# Altium PCB T1_MODIFYV1_0527.PCBDOC (part 5 of 6)
Units mm, origin at the board's own origin, x right, y up, seen from the top; angles counter-clockwise.
Board outline 1320.8 x 844.04 mm, 2 copper layers (Top Layer, Bottom Layer); 219 components, 215 nets, 1393 pads, 492 vias.
Unrouted connection lines stored in the file: 60.
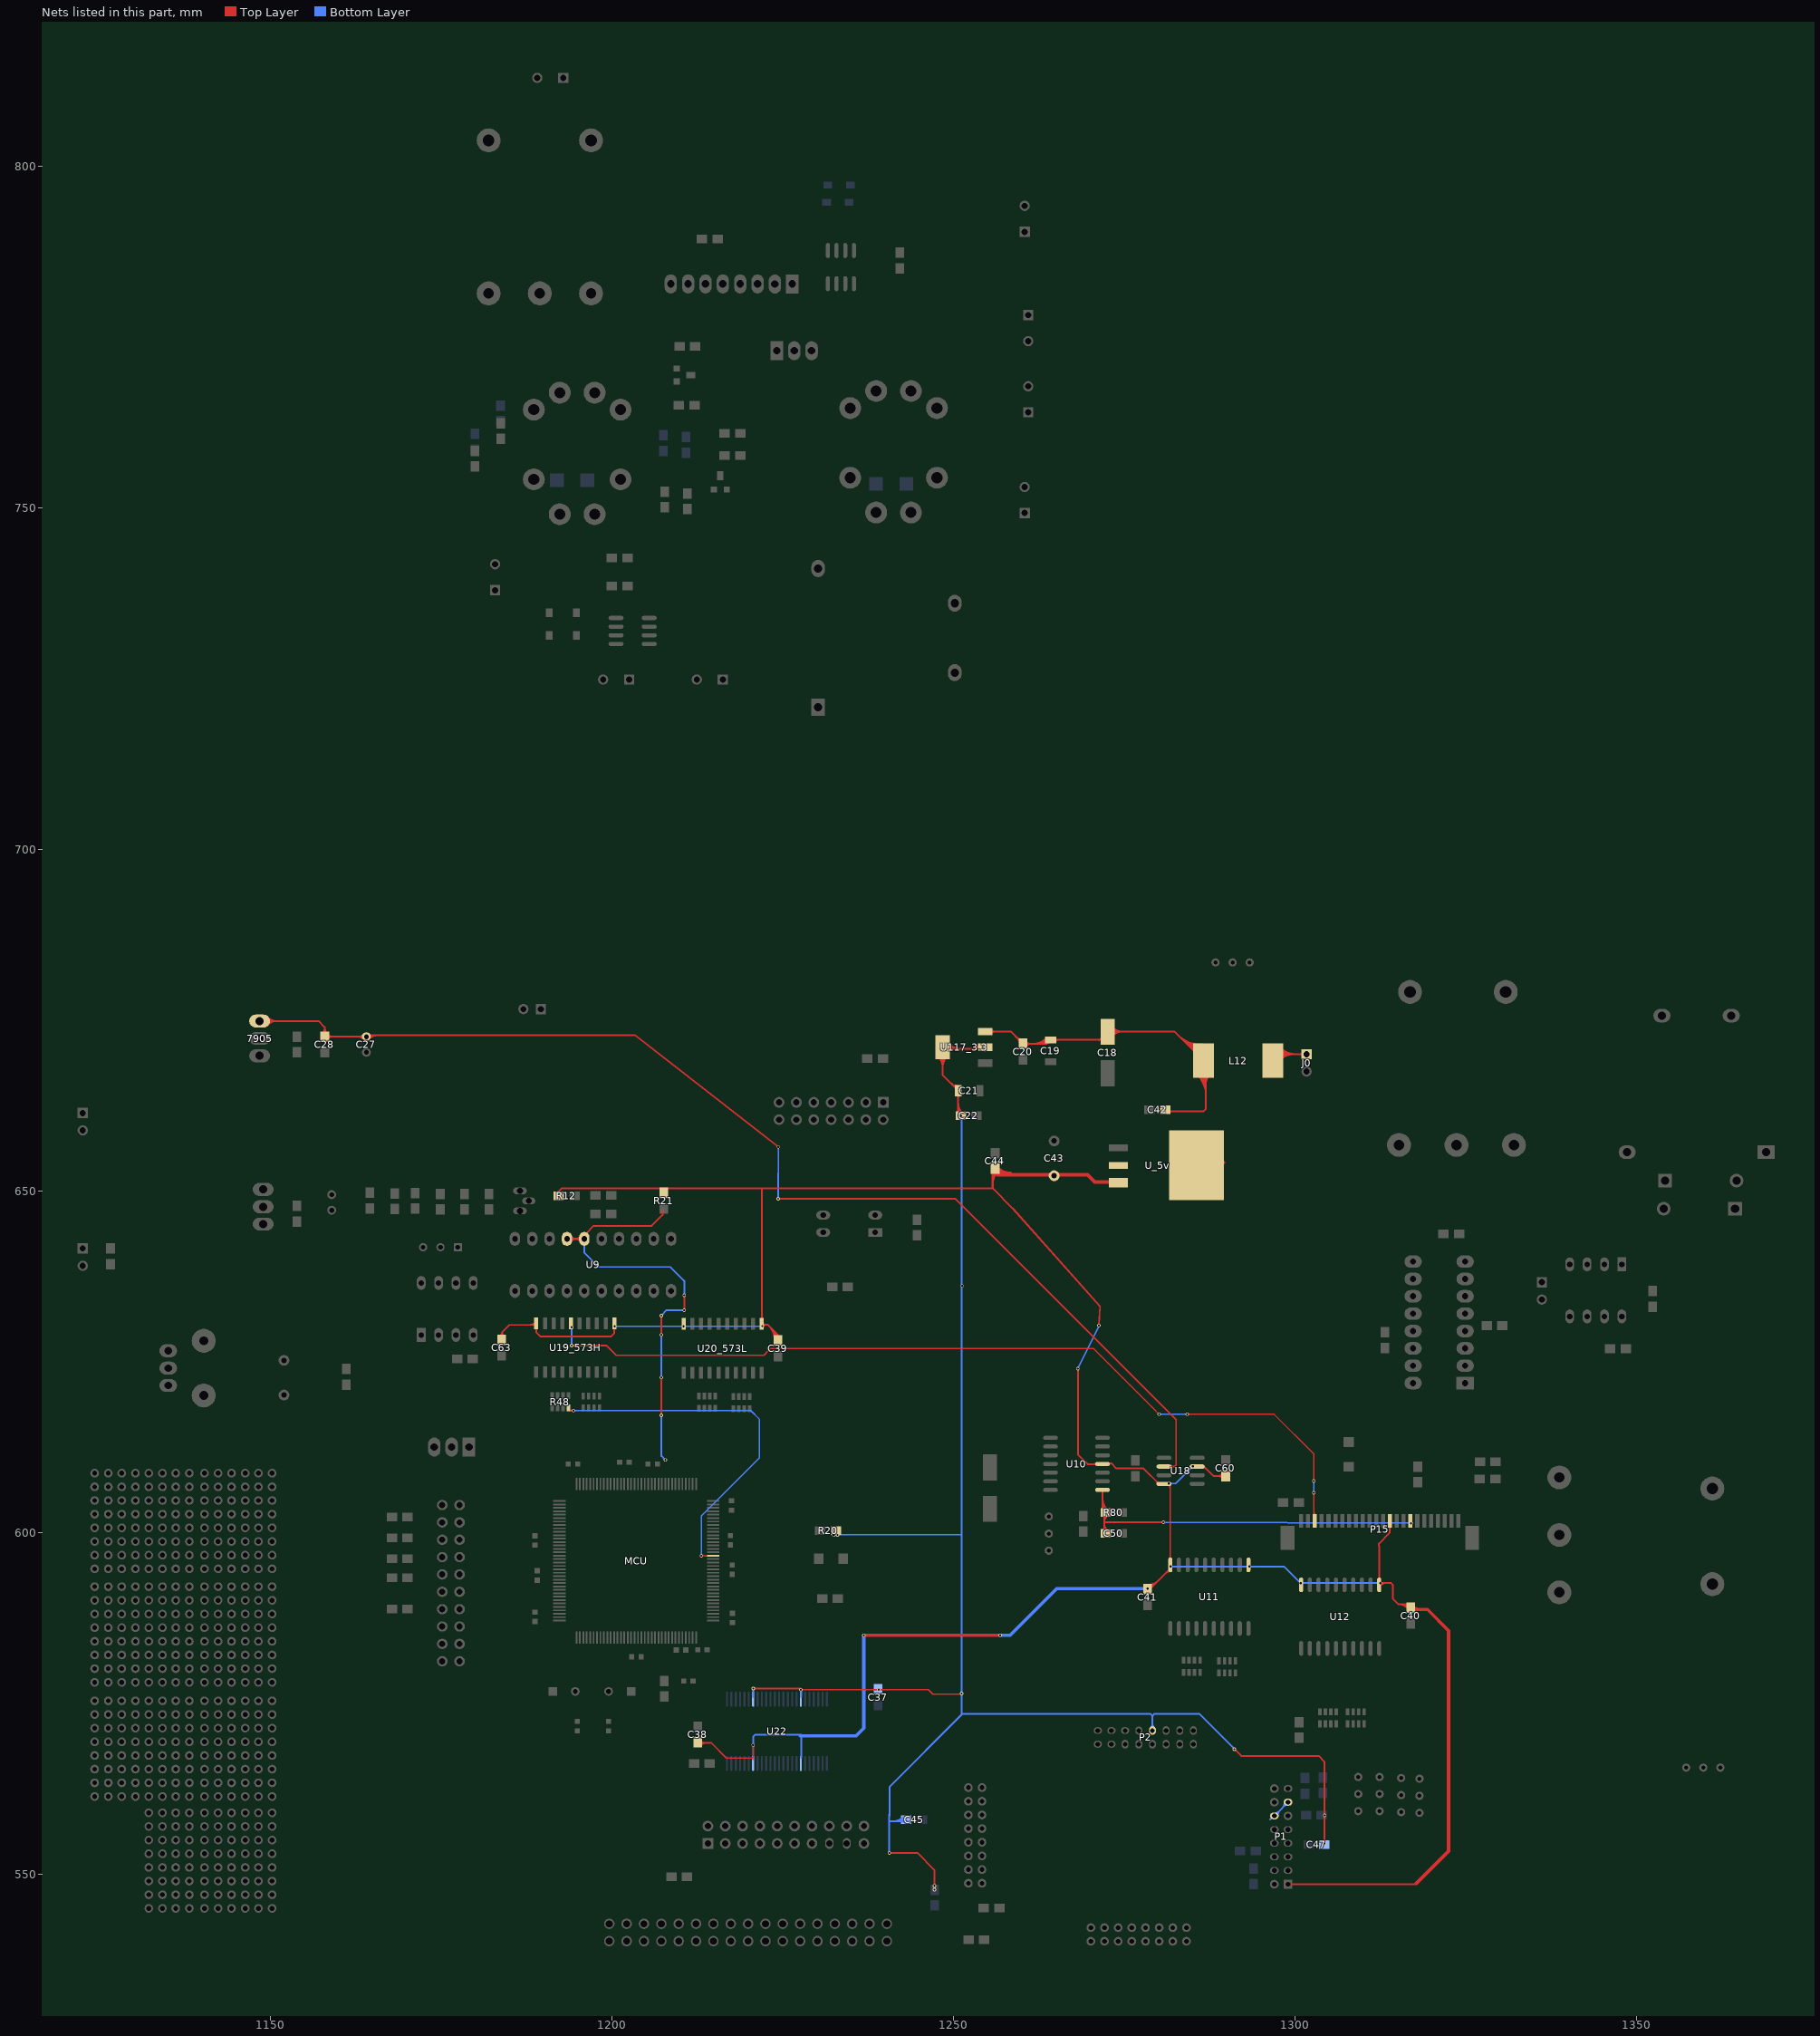
[diagram p5: the nets of this part, all layers, seen from the top]

## Via types
v1: diameter 0.5, hole 0.3, Top Layer to Bottom Layer, 470 vias
v2: diameter 0.8, hole 0.5, Top Layer to Bottom Layer, 12 vias
v3: diameter 3, hole 1.5, Top Layer to Bottom Layer, 4 vias
v4: diameter 3, hole 3, Top Layer to Bottom Layer, 4 vias
v5: diameter 1, hole 0.7, Top Layer to Bottom Layer, 2 vias

## Nets (pads, with @x,y where several pads share a name; then routed paths per layer and width w, separated by ;. In a path a pad name is that pad's centre, name@x,y a point inside that pad or via, vN(x,y) a via of type N, cw(c..) or ccw(c..) an arc to the next point about the centre after c; other vN are vias at no path point) (continued)
VCC_IN: C18.1 C19.1 C20.1 C42.1 L12.1 U117_3.3.3 U_5v.3 | length 106.2
  Top Layer w0.254: U117_3.3.3@1254.583,673.393 1258.327,673.393 C20.1@1260.119,671.601 1263.599,671.601 C19.1@1264.183,672.185 1271.371,672.185 C18.1@1272.565,673.379 1282.324,673.379 L12.1@1286.566,669.138 ; U117_3.3.3@1255.408,673.094 cw(c1256.13,672.372) 1256.13,673.393 cw(c1256.13,674.415) U117_3.3.3@1255.408,673.693 ; 1259.035,672.685 ccw(c1260.119,673.769) C20.1@1260.119,672.236 ; 1259.342,672.379 cw(c1258.692,671.728) C20.1@1259.611,671.728 ; 1259.469,672.252 ccw(c1260.119,672.902) C20.1@1260.119,671.982 ; C20.1@1260.479,671.242 cw(c1261.346,670.375) 1261.346,671.601 cw(c1261.346,672.828) C20.1@1260.479,671.961 ; 1261.523,671.601 ccw(c1261.523,674.496) C19.1@1263.57,672.449 ; 1262.136,671.601 ccw(c1262.136,673.883) C19.1@1263.749,672.27 ; 1262.749,671.601 ccw(c1262.749,673.269) C19.1@1263.929,672.09 ; 1263.363,671.601 ccw(c1263.363,672.656) C19.1@1264.108,671.91 ; C19.1@1264.797,671.922 cw(c1265.434,671.285) 1265.434,672.185 cw(c1265.434,673.086) C19.1@1264.797,672.449 ; 1271.334,672.148 cw(c1271.857,671.625) C18.1@1272.321,672.201 ; 1271.534,672.348 cw(c1272.035,671.846) C18.1@1272.48,672.399 ; C18.1@1273.021,672.924 cw(c1274.12,671.825) 1274.12,673.379 cw(c1274.12,674.934) C18.1@1273.021,673.835 ; C18.1@1273.2,672.744 cw(c1274.733,671.211) 1274.733,673.379 cw(c1274.733,675.547) C18.1@1273.2,674.014 ; C42.1@1280.947,661.695 1286.535,661.695 1286.916,662.076 1286.916,669.701 L12.1@1286.032,670.585 ; 1282.837,672.867 ccw(c1286.095,676.125) L12.1@1286.458,671.531 ; 1283.226,672.477 ccw(c1286.152,675.403) L12.1@1286.478,671.278 ; 1283.616,672.088 ccw(c1286.209,674.681) L12.1@1286.498,671.025 ; 1284.005,671.698 ccw(c1286.266,673.959) L12.1@1286.518,670.772 ; 1284.395,671.309 ccw(c1286.323,673.237) L12.1@1286.538,670.519 ; 1284.784,670.919 ccw(c1286.38,672.515) L12.1@1286.558,670.265 ; 1284.947,670.757 cw(c1284.353,670.163) L12.1@1285.193,670.163 ; L12.1@1285.595,667.142 cw(c1282.405,663.951) 1286.916,663.951 ; L12.1@1285.775,667.321 cw(c1283.018,664.565) 1286.916,664.565 ; L12.1@1285.954,667.501 cw(c1283.631,665.178) 1286.916,665.178 ; L12.1@1286.134,667.681 cw(c1284.244,665.791) 1286.916,665.791 ; L12.1@1286.313,667.86 cw(c1284.857,666.404) 1286.916,666.404 ; 1286.916,665.644 cw(c1289.034,665.644) L12.1@1287.537,667.142 ; 1286.916,666.258 cw(c1288.421,666.258) L12.1@1287.357,667.321
VDD33: C21.1 C22.1 C37.2 C45.1 C47.2 P2.23 R20.2 U22.31 U22.42 U117_3.3.2 U117_3.3.4 | length 293.2
  Top Layer w0.254: v1(1220.648,577.24) v1@1227.531,577.215 ; v1(1227.607,577.063) 1246.302,577.063 1246.962,576.402 1250.747,576.402 v1(1251.153,576.504) ; v1(1240.561,553.161) 1244.676,553.161 1247.165,550.672 v1(1247.165,547.776) ; U117_3.3.4@1247.713,669.748 cw(c1246.095,668.13) 1248.383,668.13 cw(c1250.672,668.13) U117_3.3.4@1249.054,669.748 ; U117_3.3.4@1247.893,669.928 cw(c1246.708,668.743) 1248.383,668.743 cw(c1250.059,668.743) U117_3.3.4@1248.874,669.928 ; U117_3.3.4@1248.383,670.865 1254.252,670.865 1254.608,670.509 ; U117_3.3.4@1248.383,671.093 1248.383,667.005 C21.1@1250.645,664.743 1250.645,661.467 v1(1251.052,661.06) ; U117_3.3.4@1248.695,671.405 ccw(c1249.998,672.708) 1249.998,670.865 ; U117_3.3.4@1248.874,670.603 cw(c1249.507,669.97) 1249.507,670.865 ; U117_3.3.4@1248.874,671.584 ccw(c1250.611,673.321) 1250.611,670.865 ; U117_3.3.4@1249.054,670.423 cw(c1250.12,669.357) 1250.12,670.865 ; U117_3.3.4@1249.054,671.764 ccw(c1251.224,673.934) 1251.224,670.865 ; 1249.411,665.978 ccw(c1250.645,667.212) C21.1@1250.645,665.466 ; 1249.845,665.544 ccw(c1250.645,666.345) C21.1@1250.645,665.212 ; C21.1@1250.382,664.13 cw(c1249.745,663.493) 1250.645,663.493 cw(c1251.546,663.493) C21.1@1250.909,664.13 ; 1250.645,661.734 ccw(c1251.599,661.734) C22.1@1250.925,661.06 ; 1250.645,662.348 ccw(c1252.212,662.348) C22.1@1251.104,661.24 ; 1250.645,662.961 ccw(c1252.825,662.961) C22.1@1251.284,661.42 ; 1252.485,670.865 ccw(c1252.485,672.666) U117_3.3.2@1253.759,671.393 ; 1253.099,670.865 ccw(c1253.099,672.053) U117_3.3.2@1253.939,671.213 ; v1(1291.082,568.35) 1292.073,567.36 1303.426,567.36 1304.265,566.522 v1(1304.265,554.558)
  Bottom Layer w0.254: U22.31@1220.622,575.97 v1@1220.622,577.215 ; v1(1227.607,577.063) v1@1227.709,577.063 ; U22.42@1227.658,575.945 v1@1227.658,577.012 ; v1(1232.988,599.705) 1233.322,599.745 1250.975,599.745 ; v1(1240.561,553.161) 1240.561,558.775 ; 1240.587,558.597 1240.587,562.839 1251.217,573.468 ; 1240.612,557.784 1241.146,557.784 ; 1241.775,557.809 ccw(c1241.775,559.163) C45.1@1242.742,558.216 ; 1242.249,557.809 cw(c1242.249,557.363) C45.1@1242.564,557.679 ; C45.1@1242.561,558.393 cw(c1241.171,559.754) 1241.171,557.809 C45.1@1243.076,557.809 ; v1(1251.052,661.06) 1251.153,660.959 1251.153,573.468 ; v1@1251.053,661.062 cw(c1250.811,660.82) 1251.153,660.82 ; v1@1251.078,576.731 ccw(c1250.898,576.912) 1251.153,576.912 ; v1@1251.078,576.734 cw(c1250.898,576.553) v1@1251.153,576.553 ; 1251.153,573.532 1278.788,573.532 1279.082,573.238 ; P2.23@1278.819,571.477 ccw(c1278.182,572.114) 1279.082,572.114 ccw(c1279.983,572.114) P2.23@1279.346,571.477 ; P2.23@1279.082,571.078 1279.082,573.238 ; v1(1291.082,568.35) 1285.9,573.532 1279.376,573.532 1279.082,573.238
  other v1: 1247.165,548.335 1304.29,558.673 1239.012,577.063 1232.433,599.669 1251.255,636.143 1250.671,661.086
VDD_-5: 7905.3 C27.2 C28.2 U18.6 | length 185.5
  Top Layer w0.254: 7905.3@1148.258,674.929 1157.021,674.929 1157.91,674.04 C28.2@1157.91,672.643 C27.2@1164.006,672.643 ; 7905.3@1149.36,674.525 cw(c1150.336,673.549) 1150.336,674.929 cw(c1150.336,676.309) 7905.3@1149.36,675.333 ; 7905.3@1149.54,674.345 cw(c1150.949,672.936) 1150.949,674.929 cw(c1150.949,676.922) 7905.3@1149.54,675.513 ; C28.2@1157.551,673.129 ccw(c1156.683,673.996) 1157.91,673.996 ccw(c1159.136,673.996) C28.2@1158.269,673.129 ; C28.2@1158.269,672.284 cw(c1159.136,671.416) 1159.136,672.643 cw(c1159.136,673.869) C28.2@1158.269,673.002 ; C27.2@1163.636,672.273 ccw(c1162.743,671.38) 1162.743,672.643 ccw(c1162.743,673.905) C27.2@1163.636,673.013 ; C27.2@1164.158,672.871 1203.3,672.871 v1(1224.331,656.514) ; C27.2@1164.196,672.453 cw(c1165.207,671.441) 1165.207,672.871 ; C27.2@1164.376,672.273 cw(c1165.82,670.828) 1165.82,672.871 ; C27.2@1164.376,673.013 ccw(c1164.717,673.354) 1164.717,672.871 ; v1(1224.305,648.919) 1250.239,648.919 1282.548,616.61 1282.548,609.956 1282.344,609.752 U18.6@1281.227,609.752 ; U18.6@1281.705,609.605 cw(c1282.062,609.248) 1282.062,609.752 ; U18.6@1281.705,609.849 ccw(c1281.939,610.083) 1281.939,609.752
  Bottom Layer w0.254: v1(1224.305,648.919) v1(1224.331,656.514)
VDD_D1: C38.1 C39.2 C40.2 C41.2 C43.1 C44.1 C60.2 C63.2 J0.1 L12.2 P15.14 R12.1 R21.1 U10.4 U11.11 U11.20 U12.11 U12.20 U18.3 U18.8 U19_573H.11 U19_573H.20 U20_573L.11 U20_573L.20 U22.7 U22.18 U_5v.2 | length 507
  Top Layer w0.2: 1214.501,569.265 1216.711,567.055 1220.495,567.055 1220.699,567.258 v1@1220.699,569.011
  Top Layer w0.25: v1@1268.171,624.027 1268.171,611.505 1269.594,610.083 U10.4@1271.473,610.083 ; 1270.509,610.083 ccw(c1270.509,610.592) U10.4@1270.869,610.232 ; 1270.632,610.083 cw(c1270.632,609.747) U10.4@1270.869,609.984 ; 1273.81,609.448 1277.772,609.448 U18.8@1280.211,607.009 ; 1279.649,607.571 cw(c1279.265,607.187) U18.8@1279.808,607.187 ; 1279.77,607.45 ccw(c1279.983,607.664) U18.8@1279.983,607.362 ; U18.8@1281.252,607.212 1281.684,606.781 U11.20@1281.684,596.189 ; U18.8@1281.459,607.063 cw(c1280.917,606.521) 1281.684,606.521 ; U18.8@1281.514,607.026 cw(c1281.403,606.768) 1281.684,606.768 ; U18.8@1281.526,607.222 ccw(c1281.706,607.082) U18.8@1281.544,606.92 ; U11.20@1281.586,596.226 ccw(c1281.348,596.463) 1281.684,596.463 ; 1281.684,596.586 ccw(c1282.193,596.586) U11.20@1281.833,596.226
  Top Layer w0.254: C63.2@1183.546,628.825 ccw(c1183.174,629.412) 1183.869,629.412 ; C63.2@1183.869,628.396 1183.869,629.412 ; C63.2@1184.155,628.776 cw(c1184.718,629.412) 1183.869,629.412 ; 1187.857,630.453 ccw(c1187.857,631.716) U19_573H.20@1188.75,630.823 ; 1188.47,630.453 ccw(c1188.47,631.103) U19_573H.20@1188.93,630.644 ; U19_573H.20@1188.75,630.029 cw(c1188.455,629.733) 1188.872,629.733 cw(c1189.29,629.733) U19_573H.20@1188.995,630.029 ; U19_573H.20@1188.872,630.453 1184.91,630.453 1183.869,629.412 ; U19_573H.20@1188.872,630.701 1188.872,629.387 1189.507,628.752 1199.82,628.752 1200.302,629.234 v1(1200.353,630.257) ; R12.1@1192.044,649.867 ccw(c1191.999,650.037) 1192.174,650.037 ; R12.1@1192.174,649.376 1192.174,650.037 ; R12.1@1192.305,649.867 cw(c1192.35,650.037) 1192.174,650.037 ; C38.1@1212.596,569.265 1214.501,569.265 ; C38.1@1212.674,569.06 cw(c1213.169,568.565) 1213.169,569.265 ; C38.1@1212.854,568.88 cw(c1213.782,567.952) 1213.782,569.265 ; C38.1@1212.854,569.599 ccw(c1213.66,570.405) 1213.66,569.265 ; U20_573L.11@1221.77,631.272 ccw(c1221.475,631.567) 1221.892,631.567 ccw(c1222.31,631.567) U20_573L.11@1222.015,631.272 ; U20_573L.11@1221.892,630.599 1221.892,650.418 ; U20_573L.11@1221.952,630.279 ccw(c1221.689,630.238) 1221.689,630.504 1222.731,630.504 1224.229,629.006 ; U20_573L.11@1221.991,630.266 cw(c1222.567,629.691) 1222.567,630.504 ; U20_573L.11@1222.015,630.722 ccw(c1222.54,631.247) 1222.54,630.504 ; 1222.946,630.289 cw(c1220.951,628.294) C39.2@1223.772,628.294 ; 1223.379,629.855 cw(c1221.818,628.294) C39.2@1224.026,628.294 ; 1223.813,629.422 cw(c1222.686,628.294) 1224.28,628.294 ccw(c1223.929,628.624) 1224.27,628.965 ; 1223.899,629.336 cw(c1223.547,628.983) C39.2@1223.91,628.642 ; C39.2@1224.069,628.757 ccw(c1223.955,629.006) 1224.229,629.006 ; 1224.084,629.151 cw(c1223.738,628.804) C39.2@1224.095,628.468 ; C39.2@1224.229,628.421 1224.229,629.006 ; 1224.247,628.988 cw(c1223.553,628.294) C39.2@1224.534,628.294 ; C39.2@1224.4,628.788 cw(c1224.453,629.006) 1224.229,629.006 ; 1255.691,650.452 1258.642,647.501 1271.406,633.181 v1(1271.245,630.377) ; 1255.793,650.418 1192.555,650.418 1192.174,650.037 ; C44.1@1256.03,652.805 1256.386,652.45 ; U10.4@1272.057,610.21 1273.048,610.21 ; U10.4@1272.688,610.014 cw(c1273.048,609.781) 1273.048,610.21 ; 1273.81,609.448 1273.048,610.21 ; C41.2@1278.382,591.896 ccw(c1278.382,593) 1279.162,592.219 ; C41.2@1278.382,592.15 ccw(c1278.382,593.867) 1279.596,592.653 ; C41.2@1278.382,592.404 ccw(c1278.382,594.734) 1280.03,593.087 ; C41.2@1278.509,591.896 1278.839,591.896 U11.20@1281.786,594.843 ; 1281.048,594.105 cw(c1281.709,593.444) U11.20@1281.709,594.379 ; U18.3@1285.9,609.829 1286.535,609.829 1288.034,608.33 C60.2@1289.812,608.33 ; U18.3@1286.433,609.554 cw(c1286.433,608.644) 1287.077,609.287 ; C60.2@1289.453,607.971 ccw(c1288.586,607.104) 1288.586,608.33 ccw(c1288.586,609.556) C60.2@1289.453,608.689 ; L12.2@1296.182,670.585 1296.69,670.077 J0.1@1301.902,670.077 ; L12.2@1297.148,670.595 ccw(c1298.397,671.843) 1298.397,670.077 ; L12.2@1297.327,669.551 cw(c1298.598,668.28) 1298.598,670.077 ; L12.2@1297.327,670.774 ccw(c1299.01,672.457) 1299.01,670.077 ; L12.2@1297.507,669.371 cw(c1299.212,667.667) 1299.212,670.077 ; L12.2@1297.507,670.954 ccw(c1299.623,673.07) 1299.623,670.077 ; L12.2@1297.687,669.192 cw(c1299.825,667.054) 1299.825,670.077 ; L12.2@1297.687,671.133 ccw(c1300.236,673.683) 1300.236,670.077 ; 1298.448,548.589 1317.828,548.589 ; U12.11@1312.169,593.303 ccw(c1311.873,593.599) 1312.291,593.599 ; U12.11@1312.234,592.463 cw(c1312.704,591.993) v1@1312.704,592.658 ; U12.11@1312.291,592.658 1314.018,592.658 1314.272,592.404 1314.272,590.372 1315.085,589.559 ; U12.11@1312.291,592.938 1312.291,598.043 1312.24,598.094 1312.24,598.449 1313.815,600.024 P15.14@1313.815,601.066 ; 1312.291,593.599 ccw(c1312.709,593.599) U12.11@1312.413,593.303 ; U12.11@1312.413,592.284 cw(c1313.318,591.379) 1313.318,592.658 ; P15.14@1313.742,600.938 cw(c1313.567,600.763) P15.14@1313.815,600.763 ; 1313.815,600.522 cw(c1314.403,600.522) P15.14@1313.987,600.938 ; 1315.608,589.559 cw(c1315.608,588.152) C40.2@1316.714,589.022 ; 1316.13,589.559 cw(c1316.13,588.563) C40.2@1316.914,589.178 ; C40.2@1316.514,588.865 ccw(c1315.085,587.742) 1315.085,589.559 ; C40.2@1316.761,589.559 1315.085,589.559 ; C41.2@1278.381,591.847 cw(c1278.5,591.728) 1278.5,591.896 ccw(c1278.5,591.728) C41.2@1278.381,591.847
  Top Layer w0.3: 1255.691,650.452 C44.1@1255.691,652.949 ; 1255.691,651.137 cw(c1258.105,651.137) C44.1@1256.398,652.843 ; 1255.691,651.861 cw(c1257.381,651.861) C44.1@1256.186,653.056 ; C44.1@1255.691,652.585 cw(c1256.656,652.585) C44.1@1255.974,653.268
  Top Layer w0.5: v1(1236.828,585.013) v1(1256.792,585.013) ; C44.1@1255.974,653.105 ccw(c1257.066,654.197) 1257.066,652.653 ; C44.1@1256.328,653.459 ccw(c1258.273,655.404) 1258.273,652.653 ; 1256.386,652.45 1269.568,652.45 1270.66,651.358 1272.819,651.358 ; U_5v.2@1286.403,652.938 cw(c1289.518,649.822) U_5v.2@1289.518,654.228 ; C40.2@1317.186,588.652 cw(c1317.537,588.302) C40.2@1317.537,588.797 ; C40.2@1317.186,589.197 ccw(c1318.15,590.16) 1318.15,588.797 ; C40.2@1317.32,588.797 1319.352,588.797 1322.451,585.699 1322.451,553.415 1317.739,548.703
  Bottom Layer w0.2: v1@1220.597,569.011 v1(1220.622,568.985) U22.18@1220.622,566.776
  Bottom Layer w0.25: v1(1281.506,607.238) 1282.497,607.238 v1(1285.011,609.752)
  Bottom Layer w0.254: v1(1200.353,630.257) v1(1210.418,630.257) v1(1221.975,630.282) ; v1@1220.622,568.757 1220.622,570.179 1220.927,570.484 1227.658,570.459 U22.7@1227.658,567.08 ; v1(1268.171,624.053) v1@1271.27,630.352 ; v1(1281.76,595.097) 1298.346,595.097 v1(1300.785,592.658) v1(1312.469,592.658)
  Bottom Layer w0.5: 1227.557,570.306 1235.71,570.306 1236.828,571.424 v1(1236.828,585.013) ; v1(1256.792,585.013) 1258.24,585.013 1265.072,591.845 v1(1278.382,591.845)
  other v1: 1293.292,595.097
VO: C50.2 P15.17 R80.2 U10.1 | length 62.3
  Top Layer w0.254: U10.1@1271.646,606.176 cw(c1271.35,605.88) 1271.768,605.88 cw(c1272.186,605.88) U10.1@1271.89,606.176 ; 1271.768,603.94 ccw(c1273.103,603.94) R80.2@1272.159,602.996 ; 1271.768,604.553 ccw(c1273.716,604.553) R80.2@1272.339,603.176 ; 1271.768,605.166 ccw(c1274.329,605.166) R80.2@1272.518,603.355 ; U10.1@1271.768,606.298 1271.768,603.514 R80.2@1272.286,602.996 ; C50.2@1271.8,600.307 ccw(c1271.279,600.828) 1272.015,600.828 ; R80.2@1271.8,602.637 cw(c1271.279,602.116) 1272.015,602.116 ; C50.2@1271.88,600.253 1272.015,600.389 R80.2@1272.015,603.267 ; 1272.015,600.908 ccw(c1273.119,600.908) C50.2@1272.339,600.128 ; 1272.015,601.423 cw(c1273.732,601.423) R80.2@1272.518,602.637 ; 1272.015,601.521 ccw(c1273.732,601.521) C50.2@1272.518,600.307 ; 1272.015,601.574 v1(1280.693,601.574) ; 1272.015,602.036 cw(c1273.119,602.036) R80.2@1272.339,602.816
  Bottom Layer w0.254: v1(1280.693,601.574) v1(1316.939,601.421)
WR-OUT: P15.3 U19_573H.16 | length 129.5
  Top Layer w0.2: 1222.947,626.783 1223.162,626.999 1270.457,626.999 1279.195,618.261 v1(1280.058,617.372) ; v1(1284.173,617.372) 1296.924,617.372 1302.715,611.581 v1(1302.715,607.593) ; 1302.715,602.821 ccw(c1303.226,602.821) P15.3@1302.865,602.46 ; 1302.715,603.304 ccw(c1303.709,603.304) P15.3@1303.006,602.601 ; v1(1302.715,605.892) 1302.715,602.259 P15.3@1302.868,602.107
  Top Layer w0.254: v1(1194.054,627.431) 1199.159,627.431 1200.582,626.008 1222.172,626.008 1222.947,626.783
  Bottom Layer w0.2: v1(1280.058,617.372) v1(1284.173,617.372) ; v1(1302.715,605.892) v1(1302.715,607.593)
  Bottom Layer w0.254: v1(1194.054,627.431) v1(1194.054,630.123)
WR_7545: U9.16 U9.17 | length 71.4
  Top Layer w0.254: U9.17@1193.368,643.052 U9.16@1195.908,643.052 ; U9.17@1193.638,642.782 cw(c1194.288,642.132) 1194.288,643.052 cw(c1194.288,643.972) U9.17@1193.638,643.321 ; U9.17@1193.817,642.603 cw(c1194.901,641.519) 1194.901,643.052 cw(c1194.901,644.585) U9.17@1193.817,643.501 ; U9.16@1195.459,642.603 ccw(c1194.375,641.519) 1194.375,643.052 ccw(c1194.375,644.585) U9.16@1195.459,643.501 ; U9.16@1195.639,642.782 ccw(c1194.988,642.132) 1194.988,643.052 ccw(c1194.988,643.972) U9.16@1195.639,643.321 ; U9.16@1196.111,643.458 1196.111,643.788 1197.28,644.957 1205.763,644.957 1207.364,646.557 1207.364,647.243 ; v1(1207.186,617.22) v1(1207.186,622.757) ; v1(1207.186,629.006) v1(1207.186,631.825) ; v1(1210.539,632.612) v1(1210.539,634.797)
  Bottom Layer w0.254: U9.16@1195.908,643.052 1195.908,641.045 1198.016,638.937 1208.507,638.937 1210.539,636.905 v1(1210.539,634.797) ; v1(1207.186,617.22) 1207.186,611.276 v1(1207.77,610.692) ; v1(1207.186,622.757) v1(1207.186,629.006) ; v1(1207.186,631.825) 1207.973,632.612 v1(1210.539,632.612)
WRITE: MCU.56 R48.4 | length 54.5
  Top Layer w0.2: R48.4@1193.394,617.906 v1(1194.333,617.906) ; R48.4@1193.548,618.027 ccw(c1193.841,618.319) 1193.841,617.906 ; R48.4@1193.69,618.168 ccw(c1194.324,618.802) v1@1194.324,617.906 ; v1(1213.053,596.671) 1213.485,596.671 1213.511,596.646 MCU.56@1214.323,596.646
  Bottom Layer w0.2: v1(1194.333,617.906) 1220.292,617.906 1221.511,616.687 1221.511,610.946 1213.053,602.488 v1(1213.053,596.671)
XCS1: P1.12 P1.13 | length 7.5
  Bottom Layer w0.254: 1296.302,558.051 1297.305,559.054 1297.395,559.054 P1.13@1298.931,560.589 ; P1.12@1297.066,558.962 ccw(c1297.066,559.537) 1297.472,559.13 ; P1.12@1297.185,558.589 cw(c1297.798,558.589) 1297.364,559.023 ; P1.12@1297.439,558.589 cw(c1298.665,558.589) 1297.798,559.456 ; 1298.063,559.722 ccw(c1297.196,560.589) P1.13@1298.423,560.589 ; 1298.389,560.048 cw(c1298.796,559.642) P1.13@1298.796,560.216 ; 1298.497,560.156 ccw(c1298.063,560.589) P1.13@1298.677,560.589
pads on no net: 7805.1 7805.2 7805.3 "100 57.74.1" "100 57.74.2" "-15V +15V.1" "-15V +15V.2" BackInput.1 BackInput.2 BackOut.1 BackOut.2 C32.1 C32.2 C34_1.1 C34_1.2 C35_1.1 C35_1.2 C46.1 C46.2 C47.1 C48.2 C52.1 C52.2 C53.1 C53.2 C54.1 C54.2 COM.1 COM.2 CON8.1 CON8.2 CON8.3 CON8.4 CON8.5 CON8.6 CON8.7 CON8.8 CT2.4 CT3.8 CT3_1.1 CT3_1.2 CT3_1.3 CT3_1.4 CT6.1 CT6.2 CT6.3 CT6.4 CT6.8 CT11.1 CT11.2 CT11.3 CT11.4 CT11.8 D1.1 D1.2 D2.1 D2.2 D4.1 D4.2 D6.1 D6.2 D7.1 D7.2 D10.1 D10.2 D11.1 D11.2 D56.1 D56.2 Designator4.bl Designator4.cs Designator4.d0 Designator4.d1 Designator4.d2 Designator4.d3 Designator4.d4 Designator4.d5 Designator4.d6 Designator4.d7 Designator4.d8 Designator4.d9 Designator4.gnd Designator4.nc Designator4.pen Designator4.rd Designator4.rs Designator4.rst Designator4.v5 Designator4.vdd Designator4.wr Iback1.1 Iback1.2 J20_2.0 J20_2.2 J20_4.0 J20_4.1 J20_4.2 J20_9.1 J20_9.2 JP1.1 JP1.20 JP10.1 JP10.2 JP10.4 JP10.5 JP10.6 JP10.7 JP10.8 JP10.9 JP10.10 JP10.11 JP10.12 JP10.13 JTAG.11 JTAG.17 JTAG.19 LED.1 LED.2 LED_1.1 LED_1.2 LED_2.1 LED_2.2 LED_2_1.1 LED_2_1.2 MCU.3 MCU.4 MCU.5 MCU.7 MCU.23 MCU.24 MCU.28 MCU.29 MCU.31 MCU.32 MCU.33 MCU.34 MCU.35 MCU.44 MCU.58 MCU.59 MCU.60 MCU.63 MCU.64 MCU.65 MCU.66 MCU.67 MCU.68 MCU.73 MCU.87 MCU.88 MCU.89 MCU.90 MCU.91 MCU.92 MCU.93 MCU.96 MCU.97 MCU.98 MCU.99 MCU.100 MCU.101 MCU.102_ADBURY MCU.103 MCU.104 MCU.106 MCU.111 MCU.112 MCU.113 MCU.124 MCU.125 MCU.126 MCU.127 MCU.128 MCU.129 MCU.132 MCU.135 MCU.136 MCU.137 MCU.139 MCU.140 MCU.142 os_0.0 os_0.1 os_0.2 os_1.0 os_1.1 os_1.2 os_2.0 os_2.1 os_2.2 P3.39 P5.33 P5.34 P5.35 P5.36 P5.37 P5.38 P5.39 P5.40 P5.41 P5.42 P5.43 P5.44 P5.45 P5.46 P5.47 P5.48 P6.33 P6.34 P6.35 P6.36 P6.37 P6.38 P6.39 P6.40 P6.41 P6.42 P6.43 P6.44 P6.45 P6.46 P6.47 P6.48 P7.33 P7.34 P7.35 P7.36 P7.37 P7.38 P7.39 P7.40 P7.41 P7.42 P7.43 P7.44 P7.45 P7.46 P7.47 P7.48 P8.33 P8.34 P8.35 P8.36 P8.37 P8.38 P8.39 P8.40 P8.41 P8.42 P8.43 P8.44 P8.45 P8.46 P8.47 P8.48 P8_1.33 P8_1.34 P8_1.35 P8_1.36 P8_1.37 P8_1.38 P8_1.39 P8_1.40 P8_1.41 P8_1.42 P8_1.43 P8_1.44 P8_1.45 P8_1.46 P8_1.47 P8_1.48 P9.33 P9.34 P9.35 P9.36 P9.37 P9.38 P9.39 P9.40 P9.41 P9.42 P9.43 P9.44 P9.45 P9.46 P9.47 P9.48 P9_1.33 P9_1.34 P9_1.35 P9_1.36 P9_1.37 P9_1.38 P9_1.39 P9_1.40 P9_1.41 P9_1.42 P9_1.43 P9_1.44 P9_1.45 P9_1.46 P9_1.47 P9_1.48 P10.33 P10.34 P10.35 P10.36 P10.37 P10.38 P10.39 P10.40 P10.41 P10.42 P10.43 P10.44 P10.45 P10.46 P10.47 P10.48 P10_1.33 P10_1.34 P10_1.35 P10_1.36 P10_1.37 P10_1.38 P10_1.39 P10_1.40 P10_1.41 P10_1.42 P10_1.43 P10_1.44 P10_1.45 P10_1.46 P10_1.47 P10_1.48 P11.33 P11.34 P11.35 P11.36 P11.37 P11.38 P11.39 P11.40 P11.41 P11.42 P11.43 P11.44 P11.45 P11.46 P11.47 P11.48 P11_1.33 P11_1.34 P11_1.35 P11_1.36 P11_1.37 P11_1.38 P11_1.39 P11_1.40 P11_1.41 P11_1.42 P11_1.43 P11_1.44 P11_1.45 P11_1.46 P11_1.47 P11_1.48 P12.33 P12.34 P12.35 P12.36 P12.37 P12.38 P12.39 P12.40 P12.41 P12.42 P12.43 P12.44 P12.45 P12.46 P12.47 P12.48 P12_1.33 P12_1.34 P12_1.35 P12_1.36 P12_1.37 P12_1.38 P12_1.39 P12_1.40 P12_1.41 P12_1.42 P12_1.43 P12_1.44 P12_1.45 P12_1.46 P12_1.47 P12_1.48 P13.33 P13.34 P13.35 P13.36 P13.37 P13.38 P13.39 P13.40 P13.41 P13.42 P13.43 P13.44 P13.45 P13.46 P13.47 P13.48 P13_1.33 P13_1.34 P13_1.35 P13_1.36 P13_1.37 P13_1.38 P13_1.39 P13_1.40 P13_1.41 P13_1.42 P13_1.43 P13_1.44 P13_1.45 P13_1.46 P13_1.47 P13_1.48 P14.33 P14.34 P14.35 P14.36 P14.37 P14.38 P14.39 P14.40 P14.41 P14.42 P14.43 P14.44 P14.45 P14.46 P14.47 P14.48 P14_1.33 P14_1.34 P14_1.35 P14_1.36 P14_1.37 P14_1.38 P14_1.39 P14_1.40 P14_1.41 P14_1.42 P14_1.43 P14_1.44 P14_1.45 P14_1.46 P14_1.47 P14_1.48 P14_1_1.33 P14_1_1.34 P14_1_1.35 P14_1_1.36 P14_1_1.37 P14_1_1.38 P14_1_1.39 P14_1_1.40 P14_1_1.41 P14_1_1.42 P14_1_1.43 P14_1_1.44 P14_1_1.45 P14_1_1.46 P14_1_1.47 P14_1_1.48 P15.0 P15.23 P15.24 P16.33 P16.34 P16.35 P16.36 P16.37 P16.38 P16.39 P16.40 P16.41 P16.42 P16.43 P16.44 P16.45 P16.46 P16.47 P16.48 P16_1.33 P16_1.34 P16_1.35 P16_1.36 P16_1.37 P16_1.38 P16_1.39 P16_1.40 P16_1.41 P16_1.42 P16_1.43 P16_1.44 P16_1.45 P16_1.46 P16_1.47 P16_1.48 P16_1_1.33 P16_1_1.34 P16_1_1.35 P16_1_1.36 P16_1_1.37 P16_1_1.38 P16_1_1.39 P16_1_1.40 P16_1_1.41 P16_1_1.42 P16_1_1.43 P16_1_1.44 P16_1_1.45 P16_1_1.46 P16_1_1.47 P16_1_1.48 P16_2.33 P16_2.34 P16_2.35 P16_2.36 P16_2.37 P16_2.38 P16_2.39 P16_2.40 P16_2.41 P16_2.42 P16_2.43 P16_2.44 P16_2.45 P16_2.46 P16_2.47 P16_2.48 P17.33 P17.34 P17.35 P17.36 P17.37 P17.38 P17.39 P17.40 P17.41 P17.42 P17.43 P17.44 P17.45 P17.46 P17.47 P17.48 P17_1.33 P17_1.34 P17_1.35 P17_1.36 P17_1.37 P17_1.38 P17_1.39 P17_1.40 P17_1.41 P17_1.42 P17_1.43 P17_1.44 P17_1.45 P17_1.46 P17_1.47 P17_1.48 P17_1_1.33 P17_1_1.34 P17_1_1.35 P17_1_1.36 P17_1_1.37 P17_1_1.38 P17_1_1.39 P17_1_1.40 P17_1_1.41 P17_1_1.42 P17_1_1.43 P17_1_1.44 P17_1_1.45 P17_1_1.46 P17_1_1.47 P17_1_1.48 P17_2.33 P17_2.34 P17_2.35 P17_2.36 P17_2.37 P17_2.38 P17_2.39 P17_2.40 P17_2.41 P17_2.42 P17_2.43 P17_2.44 P17_2.45 P17_2.46 P17_2.47 P17_2.48 QNPN1.1 QNPN1.2 QNPN1.3 QNPN.1 QNPN.2 QNPN.3 R14.1 R14.2 R18_1.1 R18_1.2 R19.1 R19.2 R20_1.1 R20_1.2 R21.2 R29.2 R30.1 R30.2 R35.1 R35.2 R48.1 R48.2 R48.3 R53.1 R53.2 R54.1 R54.2 R55.1 R55.2 R70.0 R81.1 R81.2 R82.1 R82.2 R83.1 R83.2 R83_1.1 R83_1.2 R83_2.1 R83_2.2 R83_2_1.1 R83_2_1.2 range.0 range.1 range.2 REL1.1 REL1.2 REL1.3 REL1.4 REL1.5 REL1.6 REL1.7 REL1.8 REL2.1 REL2.2 REL2.3 REL2.4 REL2.5 REL2.6 REL2.7 REL2.8 select_ampfilication.1 select_ampfilication.2 U2.1 U2.2 U2.3 U2.4 U2.5 U2.6 U2.7 U2.8 U3.5 U4.1 U4.2 U4.3 U4.4 U4.5 U4.6 U4.7 U4.8 U7.1 U7.2 U7.3 U7.6 U7.7 U7.9 U10.5 U10.6 U10.7 U10.8 U10.9 U10.10 U10.12 U10.13 U10.14 U19_573H.17 U19_573H.18 U19_573H.19 U32.1 U32.2 U32.3 U32.4 U64.1 U64.5 U64.8 UART.1 UART.2 UART.3 Vback.1 Vback.2 Y1.